# Altium PCB PCBVer2.PcbDoc
Units mm, origin at the board's own origin, x right, y up, seen from the top; angles counter-clockwise.
Board outline 39.9 x 13 mm, 6 copper layers (Top Layer, Layer 1, Sub Top Layer, Sub Bottom Layer, Layer 2, Bottom Layer), stack 1.244 mm thick; 66 components, 58 nets, 317 pads, 61 vias.
Unrouted connection lines stored in the file: 77.
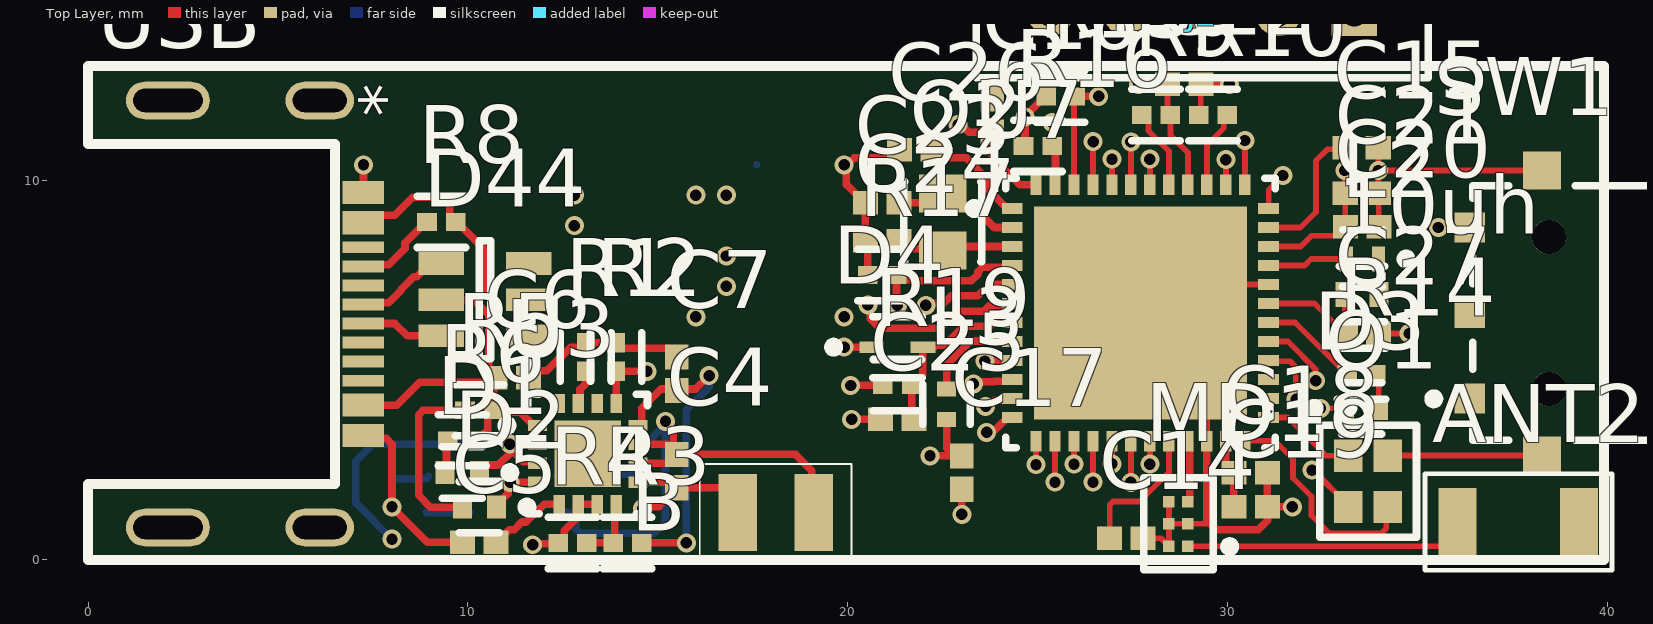
[diagram p0: Top Layer view]
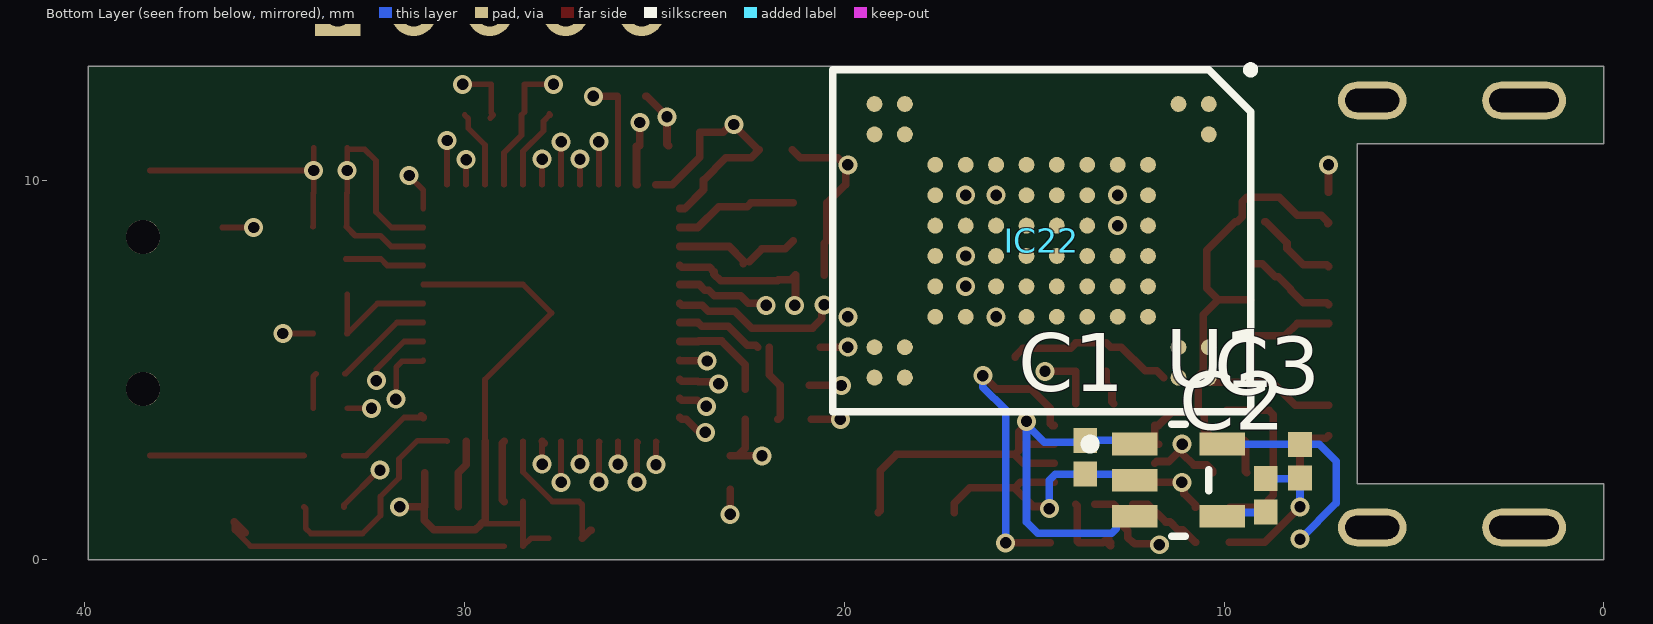
[diagram p1: Bottom Layer view, seen from below]
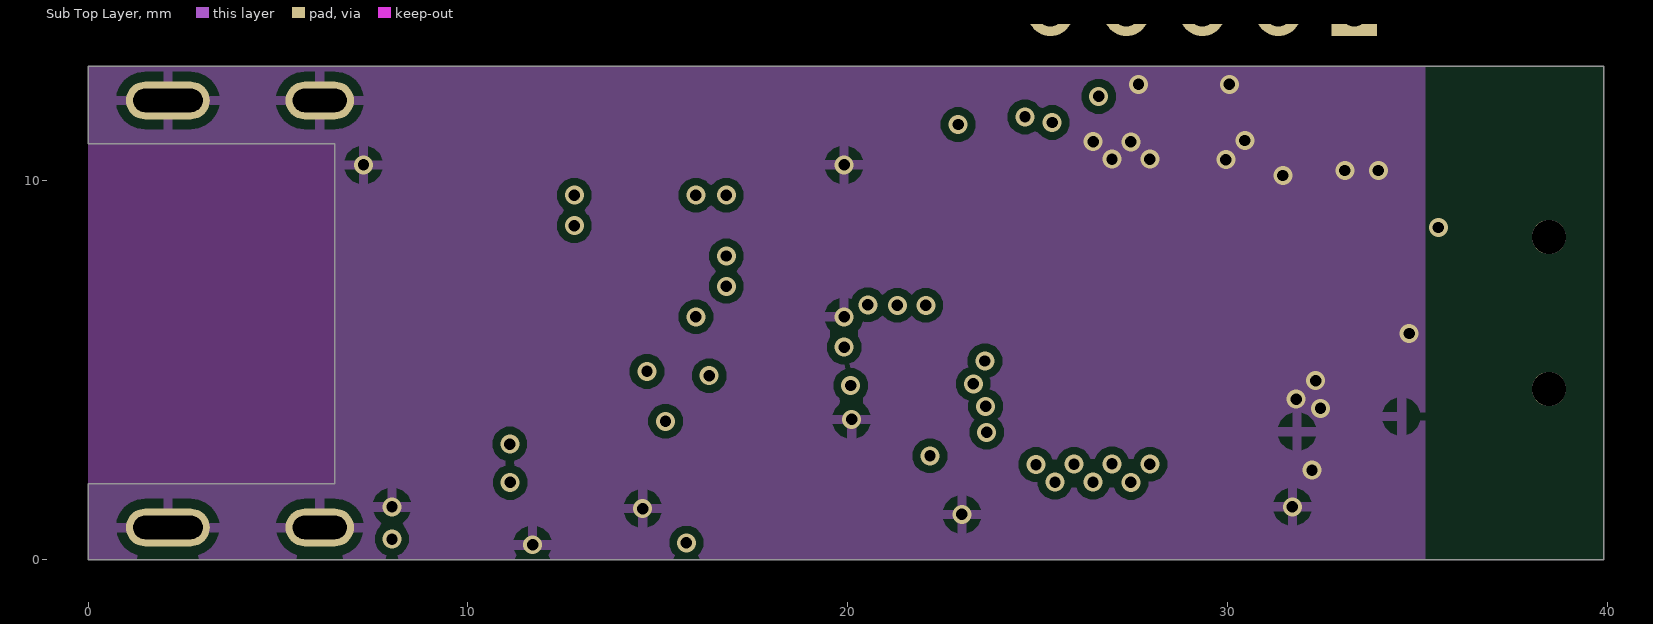
[diagram p2: Sub Top Layer]
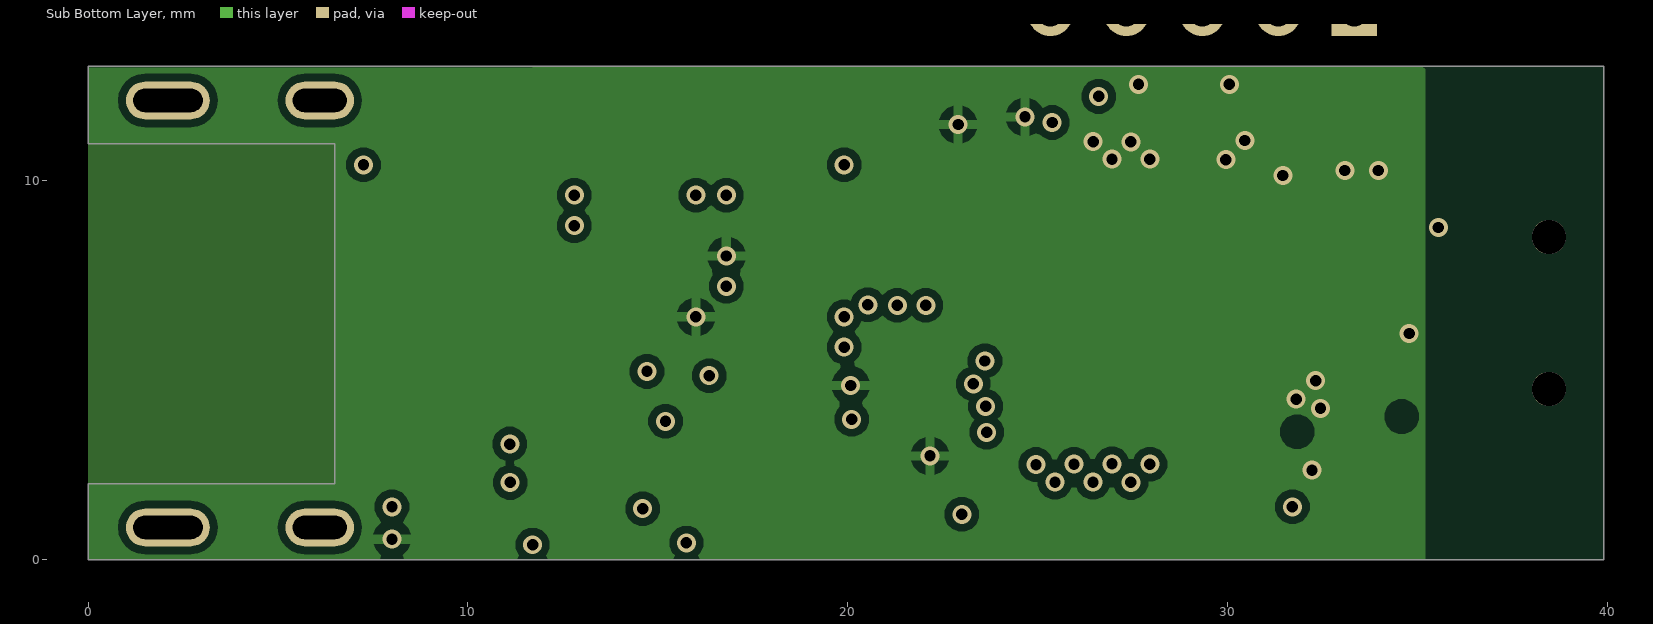
[diagram p3: Sub Bottom Layer]

## Layer stack, top to bottom
Top Solder: solder mask 0.0102, Solder Resist, Dk 3.5
Top Layer: signal copper 0.018
Dielectric 2: prepreg 0.125, PP-006, Dk 4.1
Layer 1: signal copper 0.035
Dielectric 4: prepreg 0.0711, PP-006, Dk 4.1
Sub Top Layer: signal copper 0.018
Dielectric 1: dielectric 0.71, FR-4, Dk 4.8
Sub Bottom Layer: signal copper 0.018
Dielectric 5: prepreg 0.0711, PP-006, Dk 4.1
Layer 2: signal copper 0.035
Dielectric 3: prepreg 0.125, PP-006, Dk 4.1
Bottom Layer: signal copper 0.018
Bottom Solder: solder mask 0.0102, Solder Resist, Dk 3.5

## Board outline
0,10.95 0,13 39.9,13 39.9,0 0,0 0,2 6.5,2 6.5,10.95

## Design rules (kind name [scope] priority, off if disabled: settings)
Clearance [All] p1: gap=0.2 ignorepadtopadclearanceinfootprint=FALSE except(0.175: Arc-Arc Arc-Track Arc-Via Arc-Hole Track-Track Track-Via Track-Hole Via-Via Via-Hole)
PolygonConnect [All] p1: connectstyle=Relief reliefconductorwidth=0.254 reliefentries=4 polygonreliefangle="90 Angle" airgapwidth=0.254
RoomDefinition U_LD3985M33R [InComponentClass('U_LD3985M33R')] p1: confinementstyle=ConfineIn formatcopy=TRUE lockcomponents=FALSE outline 15.1,-0.35 15.1,4.7 7.3,4.7 7.3,-0.35
RoomDefinition U_L6924D013TR [InComponentClass('U_L6924D013TR')] p2: confinementstyle=ConfineIn formatcopy=TRUE lockcomponents=FALSE outline 8.5,-0.35 20.45,-0.35 20.45,6.35 8.5,6.35
RoomDefinition U_USB [InComponentClass('U_USB')] p3: confinementstyle=ConfineIn formatcopy=TRUE lockcomponents=FALSE outline -0.35,-0.35 13.15,-0.35 13.15,13.35 -0.35,13.35
RoomDefinition U_VIBRO [InComponentClass('U_VIBRO')] p4: confinementstyle=ConfineIn formatcopy=TRUE lockcomponents=FALSE outline 6.85,46.829 31.85,46.829 31.85,59.829 6.85,59.829
RoomDefinition U_SWD [InComponentClass('U_SWD')] p5: confinementstyle=ConfineIn formatcopy=TRUE lockcomponents=FALSE outline 34.87,9.29 34.87,15.64 24.21,15.64 24.21,9.29
RoomDefinition U_STM32WB55CGU6 [InComponentClass('U_STM32WB55CGU6')] p6: confinementstyle=ConfineIn formatcopy=TRUE lockcomponents=FALSE outline 13.2,-0.36 40.32,-0.36 40.32,13.44 13.2,13.44
RoomDefinition U_M24512-DFMC6TG [InComponentClass('U_M24512-DFMC6TG')] p7: confinementstyle=ConfineIn formatcopy=TRUE lockcomponents=FALSE outline 11.825,37.148 17.825,37.148 17.825,44.148 11.825,44.148
RoomDefinition U_LSM6DSRXTR [InComponentClass('U_LSM6DSRXTR')] p8: confinementstyle=ConfineIn formatcopy=TRUE lockcomponents=FALSE outline 12.81,27.55 28.81,27.55 28.81,36.55 12.81,36.55
RoomDefinition U_LPS22HBTR [InComponentClass('U_LPS22HBTR')] p9: confinementstyle=ConfineIn formatcopy=TRUE lockcomponents=FALSE outline 13.21,19.2 23.21,19.2 23.21,26.2 13.21,26.2
RoutingVias [All] p1: holewidth=0.3 width=0.5 viastyle="Through Hole" minholewidth=0.3 minwidth=0.5 maxholewidth=0.3 maxwidth=0.5
SolderMaskExpansion [All] p1: expansion=0.102 istentingtop=FALSE
Width [All] p1: maxlimit=0.4 minlimit=0.15 preferedwidth=0.15 midlayer3_minwidth=0.254 midlayer3_maxwidth=0.254 midlayer3_prefwidth=0.254 midlayer4_minwidth=0.254 midlayer4_maxwidth=0.254 midlayer4_prefwidth=0.254 minimp=50.000000 maximp=50.000000 favimp=50.000000
30 further rules are at their usual default settings.

## Classes and differential pairs
component class U_VIBRO: D5 Q1 R11 R12 V
component class U_USB: D44 R8 USB
component class U_TC58BVG1S3HBAI4: IC22
component class U_SWD: J2 R9 R10
component class U_STM32WB55CGU6: 10uh ANT2 C14 C15 C16 C17 C18 C19 C20 C21 C22 C23 C24 C25 C26 C27 D3 D4 L2 L3 MD1 O1 O2 R14 R15 R16 R17 R19 SW1 U7
component class U_M24512-DFMC6TG: U2
component class U_LSM6DSRXTR: C9 C10 U5
component class U_LPS22HBTR: C8 U4
component class U_LD3985M33R: C1 C2 C3 U1
component class U_L6924D013TR: B C4 C5 C6 C7 D1 D2 R1 R2 R3 R4 R5 R6 U3

## Components (designator, comment, footprint, x,y, rotation, side; value= is the part's Value field where it differs from the comment)
10uh "L1" FP-LQW15DN_00-MFG 33.53,6.99 r180 top
ANT2 "KH3216-A55" KH3216-A55 37.7,1 r270 top
B "BAT-CON" BAT-CON 18.1,1.25 r180 top
C1 "10 uF" CAPC1005X55X25NL05T10 13.65,2.7 r90 bottom
C2 "10 nF" CAPC1005X55X25NL05T10 8.9,1.7 r270 bottom
C3 "1 uF" CAPC1005X55X25NL05T10 8,2.6 r90 bottom
C4 "1 uF" CAPC1005X55X25NL05T10 15.5,2.34 r90 top
C5 "330 pF" CAPC1005X55X25NL05T10 10.3,0.469 r180 top
C6 "1 uF" CAPC1005X55X25NL05T10 11.15,4.8 r0 top
C7 "1 uF" CAPC1005X55X25NL05T10 15.5,4.9 r270 top
C8 "4.7 uF" CAPC1005X55X25NL05T10 20.21,22.2 r0 top
C9 "100 nF" CAPC1005X55X25NL05T10 20.81,32.55 r0 top
C10 "100 nF" CAPC1005X55X25NL05T10 24.81,31.55 r90 top
C14 "100 nF" CAPC1005X55X25NL05T10 27.33,0.57 r0 top
C15 "100 nF" CAPC1005X55X25NL05T10 33.52,10.85 r180 top
C16 "100 nF" CAPC1005X55X25NL05T10 23.8,11.7 r90 top
C17 "100 nF" CAPC1005X55X25NL05T10 23,2.3 r90 top
C18 "100 nF" CAPC1005X55X25NL05T10 30.6,2.3 r0 top
C19 "100 pF" CAPC1005X55X25NL05T10 30.6,1.4 r180 top
C20 "4.7 uF" CAPC1005X55X25NL05T10 33.54,8.77 r180 top
C21 "100 nF" CAPC1005X55X25NL05T10 33.53,9.65 r0 top
C22 "100 nF" CAPC1005X55X25NL05T10 28.85,12.52 r180 top
C23 "4.3 pF" CAPC1005X55X25NL05T10 20.9,9.4 r180 top
C24 "4.3 pF" CAPC1005X55X25NL05T10 20.9,8.4 r0 top
C25 "100 nF" CAPC1005X55X25NL05T10 21.3,3.7 r0 top
C26 "100 nF" CAPC1005X55X25NL05T10 21.8,10.8 r0 top
C27 "4.7 uF" CAPC1005X55X25NL05T10 33.53,5.96 r0 top
D1 "LED" FP-SML-P11MTT86-MFG 9.85,2.3 r180 top
D2 "LED" FP-SML-P11MTT86-MFG 10.3,1.39 r180 top
D3 "LED" FP-SML-P11MTT86-MFG 33.52,3.99 r0 top
D4 "BAT54KFILM" FP-SOD-523-MFG 21.3,5.6 r0 top value=7pF
D5 "BAT43W-7-F" BAT43W-7-F 12.85,53.829 r90 top
D44 "USBLC6-2SC6" STM-SOT23-6L_V 10.45,6.85 r180 top
IC22 "TC58BVG1S3HBAI4" BGA63C80P10X12_900X1100X100 14.8,8.4 r270 bottom
J2 "B5B-PH-K-S(LF)(SN)" FP-B5B-PH-K-S_LF_SN-MFG 29.33,14.94 r180 top
L2 "10nh" FP-LQG15WH_02-MFG 33.54,7.92 r180 top
L3 "FBH1005-601Y" FP-BLM15-0_05-MFG 22.6,4.1 r90 top
MD1 "MLPF-WB55-01E3" FP-MLPF-WB55-01E3-MFG 28.7,0.95 r180 top
O1 "NX2016SA-32MHZ" FP-NX2016SA-MFG 33.69,2.07 r270 top
O2 "NX2012SA-32.768K" FP-NX2012SA-MFG 22.5,8.9 r270 top
Q1 "DMG3420U-7" DIOD-SOT23-3_B_V 29.85,54.829 r0 top
R1 "130 Kohm" FP-RC1005-IPC_C 13.1,5.34 r90 top
R2 "3.3 Kohm" FP-RC1005-IPC_C 13.9,5.34 r90 top
R3 "1 Kohm" FP-RC1005-IPC_C 14.2,0.45 r180 top
R4 "470 ohm" FP-RC1005-IPC_C 12.75,0.45 r180 top
R5 "680 Om" FP-RC1005-IPC_C 10.3,3.94 r180 top
R6 "680 Om" FP-RC1005-IPC_C 9.85,3.15 r180 top
R8 "5.3 Kohm" FP-RC1005-IPC_C 9.3,8.9 r0 top
R9 "10 Kohm" FP-RC1005-IPC_C 28.11,11.71 r180 top
R10 "10 Kohm" FP-RC1005-IPC_C 29.61,11.71 r0 top
R11 "100 Kohm" FP-RC1005-IPC_C 7.85,55.829 r0 top
R12 "100 ohm" FP-RC1005-IPC_C 16.85,55.829 r90 top
R14 "0 ohm" FP-RC1005-IPC_C 33.52,4.9 r0 top
R15 "1.8 Kohm" FP-RC1005-IPC_C 25.6,12.2 r180 top
R16 "1.8 Kohm" FP-RC1005-IPC_C 25,10.9 r180 top
R17 "10Kohm" FP-RC1005-IPC_C 20.9,7.5 r180 top
R19 "100 Kohm" FP-RC1005-IPC_C 21.3,4.6 r180 top
SW1 "JS102000SAQN" FP-JS102000SAQN-MFG 38.8,6.5 r90 top
U1 "LD3985M33R" FP-SOT23-5L-7049676-MFG 11.2,2.1 r180 bottom
U2 "M24512-DFMC6TG" M24512-DFMC6TG 14.925,38.898 r0 top
U3 "L6924D013TR" FP-VFQFPN16-7185330-MFG 13.15,2.79 r0 top
U4 "LPS22HBTR" FP-HLGA-10L-8479831-0 16.21,21.2 r0 top
U5 "LSM6DSRXTR" FP-LGA-14L-DM00249496-MFG 15.81,30.55 r0 top
U7 "STM32WB55CGU6" FP-STM32WB55CGU6-MFG 27.7,6.5 r0 top
USB "USB4510-03-1-A" USB4510-03-1-A 3.3,6.5 r270 top
V "VIBRO" VIBRO 24.85,58.829 r0 top

## Footprints (in the part's own frame and the unit in brackets; to place one, negate y for a bottom-side part, rotate by r counter-clockwise, add the part's x,y. Pads: shape width x height; smd on the part's side, far side on the other; paste and mask are expansions set on the pad)
BAT43W-7-F [mil]
  rect 43.75x23.65 smd paste+0 mask+0: 1(-65.91,1) 2(69.91,1)
  silkscreen extent -59,-31 63,33
BAT-CON [mil]
  rect 40x80 smd: 1(-39.37,0) 2(39.37,0)
  silkscreen extent -79,-50 79,50
BGA63C80P10X12_900X1100X100 [mm]
  round 0.418 smd: A1(-3.6,4.4) A2(-2.8,4.4) A9(2.8,4.4) A10(3.6,4.4) B1(-3.6,3.6) B9(2.8,3.6) B10(3.6,3.6) C3(-2,2.8) C4(-1.2,2.8) C5(-0.4,2.8) C6(0.4,2.8) C7(1.2,2.8) C8(2,2.8) D3(-2,2) D4(-1.2,2) D5(-0.4,2) D6(0.4,2) D7(1.2,2) D8(2,2) E3(-2,1.2) E4(-1.2,1.2) E5(-0.4,1.2) E6(0.4,1.2) E7(1.2,1.2) E8(2,1.2) F3(-2,0.4) F4(-1.2,0.4) F5(-0.4,0.4) F6(0.4,0.4) F7(1.2,0.4) F8(2,0.4) G3(-2,-0.4) G4(-1.2,-0.4) G5(-0.4,-0.4) G6(0.4,-0.4) G7(1.2,-0.4) G8(2,-0.4) H3(-2,-1.2) H4(-1.2,-1.2) H5(-0.4,-1.2) H6(0.4,-1.2) H7(1.2,-1.2) H8(2,-1.2) J3(-2,-2) J4(-1.2,-2) J5(-0.4,-2) J6(0.4,-2) J7(1.2,-2) J8(2,-2) K3(-2,-2.8) K4(-1.2,-2.8) K5(-0.4,-2.8) K6(0.4,-2.8) K7(1.2,-2.8) K8(2,-2.8) L1(-3.6,-3.6) L2(-2.8,-3.6) L9(2.8,-3.6) L10(3.6,-3.6) M1(-3.6,-4.4) M2(-2.8,-4.4) M9(2.8,-4.4) M10(3.6,-4.4)
  silkscreen extent -4.6,-5.5 4.5,5.6, body extent -4.5,-5.5 4.5,5.5, height 1
CAPC1005X55X25NL05T10 [mm] "Chip Capacitor, 2-Leads, Body 1.00x0.50mm, IPC Medium Density"
  rect 0.66x0.62 smd: 1(-0.44,0) 2(0.44,0)
  body extent -0.53,-0.28 0.53,0.27, height 0.55
DIOD-SOT23-3_B_V [mm] "SOT23, 3-Leads, Body 2.9x1.3mm, Pitch 0.95mm"
  rect 0.9x0.8 smd: 1(-1,0.95) 2(-1,-0.95) 3(1,0)
  silkscreen extent -1.12,-1.45 0.65,2.02, body extent -0.65,-1.45 0.65,1.45, height 1.17
FP-B5B-PH-K-S_LF_SN-MFG [mm]
  rect 1.2x1.2 hole 0.7 paste-2539.97 mask+0: 1(-4,0.55)
  round 1.2 hole 0.7 paste-2539.97 mask+0: 2(-2,0.55) 3(0,0.55) 4(2,0.55) 5(4,0.55)
  silkscreen extent -6.68,-2.25 5.95,2.25, body extent -6.05,-2.35 6.05,2.35, height 0.25
FP-BLM15-0_05-MFG [mm]
  rect 0.4x0.5 smd paste+0 mask+0: 1(-0.4,0) 2(0.4,0)
  silkscreen extent -0.53,-0.63 0.52,0.63, body extent -0.7,-0.38 0.7,0.38, height 0.25
FP-HLGA-10L-8479831-0 [mm]
  rect 0.375x0.35 smd paste+0 mask+0: 1(-0.763,0.25) 2(-0.763,-0.25) 6(0.763,-0.25) 7(0.763,0.25)
  rect 0.35x0.375 smd paste+0 mask+0: 3(-0.5,-0.763) 4(0,-0.763) 5(0.5,-0.763) 8(0.5,0.763) 9(0,0.763) 10(-0.5,0.763)
  silkscreen extent -2,-1.3 1.3,1.3, body extent -1.55,-1.55 1.55,1.55, height 0.25
FP-JS102000SAQN-MFG [mm]
  rect 0.8x0.8 smd paste+0 mask+0: 1(-2.25,2.43) 2(0,2.43) 3(2.25,2.43)
  rect 1x1 smd paste+0 mask+0: 4(-3.75,0.53) 5(3.75,0.53)
  round 0.9 hole 0.9 unplated paste-2539.97 mask+0: ""(-2,0.35) ""(2,0.35)
  silkscreen extent -3.35,-2.35 3.35,3.5, body extent -4.35,-2.45 4.35,2.93, height 0.25
FP-LGA-14L-DM00249496-MFG [mm]
  rect 0.575x0.35 smd paste-1000 mask+0: 1(-1.162,0.75) 2(-1.162,0.25) 3(-1.162,-0.25) 4(-1.162,-0.75) 8(1.162,-0.75) 9(1.162,-0.25) 10(1.162,0.25) 11(1.162,0.75)
  rect 0.35x0.575 smd paste-1000 mask+0: 5(-0.5,-0.913) 6(0,-0.913) 7(0.5,-0.913) 12(0.5,0.913) 13(0,0.913) 14(-0.5,0.913)
  silkscreen extent -2.57,-1.6 1.85,1.6, body extent -2.05,-1.8 2.05,1.8, height 0.25
FP-LQG15WH_02-MFG [mm]
  rect 0.35x0.65 smd paste+0 mask+0: 1(-0.425,0) 2(0.425,0)
  silkscreen extent -1.28,-0.78 0.53,0.72, body extent -0.7,-0.43 0.7,0.43, height 0.25
FP-LQW15DN_00-MFG [mm]
  rect 0.5x0.66 smd paste+0 mask+0: 1(-0.45,0) 2(0.45,0)
  silkscreen extent -0.6,-0.74 0.6,0.72, body extent -0.8,-0.48 0.8,0.48, height 0.25
FP-MLPF-WB55-01E3-MFG [mm]
  rect 0.3x0.3 smd paste-1000 mask-1000: A1(-0.25,0.587) A2(-0.25,0) A3(-0.25,-0.587) B1(0.25,0.587) B2(0.25,0) B3(0.25,-0.587)
  silkscreen extent -1.48,-1.21 0.91,1.21, body extent -1.01,-1.31 1.01,1.31, height 0.25
FP-NX2012SA-MFG [mm]
  rect 1x1.25 smd paste+0 mask+0: 1(-0.75,0) 2(0.75,0)
  silkscreen extent -1.05,-1.02 1.05,1.02, body extent -1.35,-0.72 1.35,0.72, height 0.25
FP-NX2016SA-MFG [mm]
  rect 0.85x0.75 smd paste+0 mask+0: 1(-0.675,-0.525) 2(0.675,-0.525) 3(0.675,0.525) 4(-0.675,0.525)
  silkscreen extent -2.07,-1.28 1.48,1.28, body extent -1.2,-1 1.2,1, height 0.25
FP-RC1005-IPC_C [mm]
  rect 0.515x0.472 smd paste+0 mask+0: 1(-0.379,0) 2(0.379,0)
  silkscreen extent -0.64,-0.67 0.64,0.67, body extent -0.74,-0.38 0.74,0.38, height 0.25
FP-SML-P11MTT86-MFG [mm]
  rect 0.5x0.6 smd paste+0 mask+0: 1(-0.45,0) 2(0.45,0)
  silkscreen extent -1.38,-0.67 0.53,0.67, body extent -0.8,-0.43 0.8,0.43, height 0.25
FP-SOD-523-MFG [mm]
  rect 0.65x0.3 smd paste+0 mask+0: 1(-0.675,0) 2(0.675,0)
  silkscreen extent -1.8,-0.8 0.65,0.8, body extent -1.1,-0.55 1.1,0.55, height 0.25
FP-SOT23-5L-7049676-MFG [mm]
  rect 1.2x0.6 smd paste+0 mask+0: 1(-1.15,0.95) 2(-1.15,0) 3(-1.15,-0.95) 4(1.15,-0.95) 5(1.15,0.95)
  silkscreen extent -2.45,-1.48 0.8,1.47, body extent -0.87,-1.5 0.87,1.5, height 1.45
FP-STM32WB55CGU6-MFG [mm]
  rect 0.55x0.3 smd paste+0 mask+0: 1(-3.375,2.75) 2(-3.375,2.25) 3(-3.375,1.75) 4(-3.375,1.25) 5(-3.375,0.75) 6(-3.375,0.25) 7(-3.375,-0.25) 8(-3.375,-0.75) 9(-3.375,-1.25) 10(-3.375,-1.75) 11(-3.375,-2.25) 12(-3.375,-2.75) 25(3.375,-2.75) 26(3.375,-2.25) 27(3.375,-1.75) 28(3.375,-1.25) 29(3.375,-0.75) 30(3.375,-0.25) 31(3.375,0.25) 32(3.375,0.75) 33(3.375,1.25) 34(3.375,1.75) 35(3.375,2.25) 36(3.375,2.75)
  rect 0.3x0.55 smd paste+0 mask+0: 13(-2.75,-3.375) 14(-2.25,-3.375) 15(-1.75,-3.375) 16(-1.25,-3.375) 17(-0.75,-3.375) 18(-0.25,-3.375) 19(0.25,-3.375) 20(0.75,-3.375) 21(1.25,-3.375) 22(1.75,-3.375) 23(2.25,-3.375) 24(2.75,-3.375) 37(2.75,3.375) 38(2.25,3.375) 39(1.75,3.375) 40(1.25,3.375) 41(0.75,3.375) 42(0.25,3.375) 43(-0.25,3.375) 44(-0.75,3.375) 45(-1.25,3.375) 46(-1.75,3.375) 47(-2.25,3.375) 48(-2.75,3.375)
  rect 5.6x5.6 smd paste+0 mask+0: 49(0,0)
  silkscreen extent -4.5,-3.55 3.55,3.55, body extent -3.75,-3.75 3.75,3.75, height 0.25
FP-VFQFPN16-7185330-MFG [mm]
  rect 0.5x0.3 smd paste+0 mask+0: 1(-1.325,0.75) 2(-1.325,0.25) 3(-1.325,-0.25) 4(-1.325,-0.75) 9(1.325,-0.75) 10(1.325,-0.25) 11(1.325,0.25) 12(1.325,0.75)
  rect 0.3x0.5 smd paste+0 mask+0: 5(-0.75,-1.325) 6(-0.25,-1.325) 7(0.25,-1.325) 8(0.75,-1.325) 13(0.75,1.325) 14(0.25,1.325) 15(-0.25,1.325) 16(-0.75,1.325)
  rect 1.75x1.75 smd paste+0 mask+0: 17(0,0)
  silkscreen extent -2.25,-1.58 1.58,1.58, body extent -1.68,-1.68 1.68,1.68, height 0.25
KH3216-A55 [mm]
  rect 1.8x1 smd: 1(0,-1.651) 2(0,1.549)
  silkscreen extent -1.27,-2.51 1.27,2.41
M24512-DFMC6TG [mm]
  rect 0.8x0.25 smd paste+0 mask+0: 1(-1.475,0.852) 2(-1.475,0.352) 3(-1.475,-0.149) 4(-1.475,-0.649) 5(1.424,-0.649) 6(1.424,-0.149) 7(1.424,0.352) 8(1.424,0.852)
  silkscreen extent -2.53,-1.08 0.88,1.28
STM-SOT23-6L_V [mm] "SOT23, 6-Leads, Body 3.05x1.75mm, Pitch 0.95mm"
  rect 1.2x0.6 smd: 1(-1.15,0.95) 2(-1.15,0) 3(-1.15,-0.95) 4(1.15,-0.95) 5(1.15,0) 6(1.15,0.95)
  silkscreen extent -1.28,-1.55 0.15,1.92, body extent -1.6,-1.53 1.6,1.53, height 1.45
USB4510-03-1-A [mil]
  rect 24x43 smd paste+0 mask+0: A1-B12(-125,155.5) A4-B9(-93.5,155.5) B1-A12(127,155.5) B4-A9(95.5,155.5)
  rect 12x43 smd paste+0 mask+0: A5(-48.2,155.5) A6(-8.8,155.5) A7(10.9,155.5) A8(50.3,155.5) B5(70,155.5) B6(30.6,155.5) B7(-28.5,155.5) B8(-68,155.5)
  oval 39x71 hole 24 slot 56 at 90 deg: GND(-220.25,110.25) GND(222.25,110.25)
  oval 39x87 hole 24 slot 72 at 90 deg: GND(-220.25,-47.2) GND(222.25,-47.2)
VIBRO [mil]
  rect 40x40 smd mask+1: 1(40,0) 2(-40,0)
  silkscreen extent -65,-455 65,25

## Part data
10uh: library part CMP-06042-016523-1, "FIXED IND 10UH 120MA 5.405OHM", RoHS Compliant=Yes
C1 C2 C3 C4 C5 C6 C7 C8 C9 C10 C14 C15 C16 C17 C18 C19 C20 C21 C22 C23 C24 C25 C26 C27: library part CMP-2008-04515-1, Manufacturer=Murata, Part Number=GRM155F50J684ZE01D
D1 D2 D3: library part CMP-2000-07126-2, "LED YELLOW/GREEN CLEAR 1006 SMD", Case Code (Imperial)=0402, Case Code (Metric)=1005, Color=Green, Forward Current=20mA, Forward Voltage=1.9V, Lens Color=Colorless, Max Operating Temperature=85°C, Min Operating Temperature=-40°C, Package Quantity=1, Power Rating=54mW, Test Current=1mA, Case/Package=0402, Dominant Wavelength=569nm, Height=0.25mm, Illumination Color=Green, Lead Free="Lead Free", Length=1mm, Lens Style=Diffused, Lens Transparency=Clear, Luminous Intensity=2.1mcd, Mount="Surface Mount", Number of LEDs=1, Number of Pins=2, Packaging="Tape and Reel", Radiation Hardening=No, REACH SVHC="No SVHC", RoHS Compliant=Yes, Series=PicoLED™, Viewing Angle=150°, Wavelength=569nm, Width=0.6mm
D4: library part CMP-12187-000026-1, "DIODE SCHOTTKY 40V 300MA SOD523", Capacitance=7pF, Forward Current=300mA, Manufacturer=STMicroelectronics, Max Junction Temp=+150°C, Max Repetitive Reverse Voltage=40V, Max Surge Forward Current=1.25A, Package=SOD-523, Peak Reverse Current=1uA, Temperature="-40°C to +150°C", Temperature Range Low=-40°C, Automotive=No, Category=Diode, ComponentLink2Description=Datasheet, ComponentLink2URL=https://www.st.com/content/ccc/resource/technical/document/datasheet/07/50/54/f2/0d/ba/4a/79/CD00001322.pdf/files/CD00001322.pdf/jcr:content/translations/en.CD00001322.pdf, Device Class L1="Discrete Semiconductors", Device Class L2=Diodes, Device Class L3="Schottky Diodes", Digikey Description="DIODE SCHOTTKY 40V 300MA SOD523", Height=0.7mm, Lead Free=Yes, Manufacturer Part Number=BAT54KFILM, Mouser Description="Schottky Diodes & Rectifiers schottky diode", Octopart=https://octopart.com/bat54kfilm-stmicroelectronics-39618022, RoHS=TRUE, Temperature Range High=+150°C
D44: library part CMP-2000-05378-1, "Very low capacitance ESD protection, 3.5 pF, -40 to 125 degC, 6-Pin SOT23, RoHS, Tape and Reel", Capacitance Value=3.5pF, Clamping Voltage=17V, Leakage Current=0.15uA, Manufacturer=STMicroelectronics, Operating Temp Range=-40Cto125C, Operating Temperature Classification=Automotive, Operating Temperature Max Deg. C=125C, Operating Temperature Min Deg. C=-40C, Package / Case=SOT-23, Package Description="6-Pin Small Outline Transistor, Body 2.925 x 1.625 mm, Pitch 0.95 mm", Package Reference=SOT23-6L, Peak Pulse Current=5A, Reverse Breakdown Voltage=6V, Reverse Stand-off Voltage=5V, Test Current (It)=1mA, Clamping Voltage (Max)=17V, Configuration=Dual, Datasheet URL=http://www.st.com/st-web-ui/static/active/en/resource/technical/document/datasheet/CD00050750.pdf, Datasheet Version="Rev. 5, 10/2011", Direction Type=Uni-Directional, Leakage Current (Max)=0.15uA, Manufacturer URL=http://www.st.com/, Mounting=SurfaceMount, Mounting Style=SurfaceMount, Number of Elements=1, Packaging=TapeandReel, Pin Count=6, Polarity=Uni-Directional, Product Depth (mm)=1.75mm, Product Height (mm)=1.3mm, Product Length (mm)=3.05mm, Rad Hardened=No, Suppressor Type=DiodeArrays, Working Voltage=5V, Working Voltage (Max)=5V
IC22: "Integrated Circuit", Manufacturer_Name=Toshiba, Mouser Part Number=757-TC58BVG1S3HBAI4, Datasheet Link=https://media.digikey.com/pdf/Data%20Sheets/Toshiba%20PDFs/KIOXIA_TC58BVG1S3HBAI4_REV2.00_E20191001C.pdf, Height=1mm, Manufacturer_Part_Number=TC58BVG1S3HBAI4, Mouser Price/Stock=https://www.mouser.com/Search/Refine.aspx?Keyword=757-TC58BVG1S3HBAI4
J2: library part CMP-2000-05908-2, "CONN HEADER VERT 5POS 2MM", Color=Natural, Contact Resistance=20mR, Current Rating=2A, Flammability Rating="UL94 V-0", Housing Color=White, Insulation Resistance=1MR, Max Operating Temperature=85°C, Max Voltage Rating (AC)=100V, Min Operating Temperature=-25°C, Connector Type=Header, Contact Finish - Mating=TIN, Contact Material=Brass, Contact Mating Length=0.13inch, Contact Plating=Tin, Contact Shape=Square, Contact Type="Male Pin", Depth=4.5mm, Fastening Type=Detent, Gender=Male, Height=9.4mm, Housing Material=Polyamide, Insulation Color=Natural, Insulation Material=Nylon, Lead Free="Lead Free", Lead Pitch=2mm, Length=11.9mm, Mated Stacking Heights=8mm, Material=Polyamide, Max Current Rating=2A, Mount="Through Hole", Number of Contacts=5, Number of Pins=5, Number of Poles=5, Number of Positions=5, Number of Rows=1, Orientation=Straight, Packaging=Bulk, Pitch=2mm, REACH SVHC="No SVHC", Series=PH, Termination=Solder, Voltage Rating=100V, Voltage Rating (AC)=100V, Width=4.5mm, Working Voltage=100V
L2: library part CMP-06042-005237-1, "Multilayer type Inductor for Automotive 10nH ±5% 0.19Ω 500mA 0402", Case Code (Imperial)=0402, Case Code (Metric)=1005, Current Rating=500mA, DC Resistance (DCR)=190mR, Inductance=10nH, Max Operating Temperature=125°C, Min Operating Temperature=-55°C, Ratings=AEC-Q200, Self Resonant Frequency=3.3GHz, Test Frequency=100MHz, Tolerance=5%, Case/Package=0402, Core Material=Air, Mount="Surface Mount", Packaging="Cut Tape", Shielding=Unshielded
L3: library part CMP-0686-00187-4, "Chip Ferrite Bead, 0402, 600Ω @ 100MHz, 0.52Ω, 25%, 300mA", Case Code (Imperial)=0402, Case Code (Metric)=1005, Current Rating=300mA, DC Resistance (DCR)=520mR, DC Resistance-Max=600mR, Frequency=100MHz, Max Operating Temperature=125°C, Min Operating Temperature=-55°C, Package Quantity=10000, Tolerance=25%, Case/Package=0402, Core Material=Ferrite, DC Current=300mA, Depth=0.55mm, Height=0.5mm, Impedance=600R, Lead Free="Lead Free", Length=1mm, Material=Steel, Max Current Rating=300mA, Max DC Current=300mA, Military Standard=Not, Number of Circuits=1, Number of Lines=1, Number of Pins=2, Packaging="Tape and Reel", Radiation Hardening=No, REACH SVHC="No SVHC", RoHS Compliant=Yes, Series=BLM15AG_SN, Shielding=Unshielded, Termination=SMD/SMT, Test Frequency=100MHz, Width=0.5mm
MD1: library part CMP-12074-000002-1, "RF FILTER LOW PASS 2.45GHZ 6SMD"
O1: library part CMP-200220-000017-1, "CRYSTAL 32.0000MHZ 8PF SMD", Case/Package=SMD/SMT, ESR (Equivalent Series Resistance)=60R, Frequency=32MHz, Load Capacitance=8pF, Max Operating Temperature=125°C, Min Operating Temperature=-40°C, Ratings=AEC-Q200, Mount="Surface Mount", Packaging="Tape and Reel"
O2: library part CMP-200220-000019-1, "CRYSTAL 32.7680KHZ 12.5PF SMD", Case/Package=SMD/SMT, ESR (Equivalent Series Resistance)=80kR, Frequency=32.768kHz, Frequency Tolerance=20ppm, Load Capacitance=12.5pF, Max Operating Temperature=85°C, Min Operating Temperature=-40°C, Height=0.024inch, Length=0.081inch, Mount="Surface Mount", Packaging="Cut Tape", RoHS Compliant=Yes, Series=NX2012SA, Width=0.047inch
Q1: library part CMP-2000-06172-1, "N-Channel Enhancement Mode MOSFET, 20 V, -55 to 150 degC, 3-Pin SOT23, RoHS, Tape and Reel", Drain-Source On Resistance-Max=29mO, Drain-to-Source Voltage [Vdss]=20V, Manufacturer="Diodes Inc", Package Description="3-Pin Small Outline Transistor, Body 2.9 x 1.3 mm, Pitch 0.96 mm", Package Reference=SOT23-3, Rated Power Dissipation=740mW, Channel Type=N-Channel, Datasheet URL=http://www.diodes.com/_files/datasheets/ds31867.pdf, Datasheet Version="Rev. 5-2, 09/2013", Manufacturer URL=http://www.diodes.com/, Mounting Technology=SurfaceMount, Qg Gate Charge=5.4nC
R1 R2 R3 R4 R5 R6 R8 R9 R10 R11 R12 R14 R15 R16 R17 R19: library part CMP-13261-000953-1, "Res Thick Film 0402 1.87kΩ 1% 0.063W ±100ppm/°C Molded SMD T/R", Case Code (Imperial)=0402, Case Code (Metric)=1005, Max Operating Temperature=155°C, Max Power Dissipation=63mW, Min Operating Temperature=-55°C, Package Quantity=1, Resistance=1.87kR, Temperature Coefficient=100ppm/°C, Tolerance=1%, Voltage Rating (DC)=50V, Case/Package=0402, Composition="Thick Film", Contact Plating=Tin, Depth=0.5mm, Features="Moisture Resistant", Height=0.016inch, Lead Free="Lead Free", Length=1mm, Military Standard=Not, Number of Terminations=2, Packaging="Tape and Reel", Power Rating=63mW, Radiation Hardening=No, Width=0.02inch
SW1: library part CMP-10038-000025-1, "SWITCH SLIDE SPDT 1MA 5V", Actuator Color=Black, Case/Package=SMD/SMT, Contact Current Rating=1mA, Contact Resistance=70mR, Flammability Rating="UL94 V-2", Max Operating Temperature=85°C, Max Voltage Rating (DC)=5V, Min Operating Temperature=-20°C, Package Quantity=1, Actuator Length=1.5mm, Actuator Material=Nylon, Actuator Type=Standard, Contact Material="Copper Alloy", Contact Plating=Silver, Current Rating=1mA, Depth=4.82mm, Electrical Life=15000Cycles, Housing Material=Nylon, Length=7.8mm, Max Current Rating=1mA, Mount="Surface Mount", Orientation="Right Angle", Packaging="Tape and Reel", Radiation Hardening=No, REACH SVHC="No SVHC", RoHS Compliant=Yes, Series=JS, Switch Function=On-On, Switch Travel=1.5mm, Termination="Gull Wing", Throw Configuration=SPDT, Voltage Rating (DC)=5V
U1: library part CMP-0244-00328-2, "IC REG LINEAR 3.3V 150MA SOT23-5", Case/Package=SOT-23, Dropout Voltage=60mV, Input Bias Current=85uA, Max Input Voltage=6V, Max Operating Temperature=125°C, Max Output Current=150mA, Min Current Limit=300mA, Min Input Voltage=2.5V, Min Operating Temperature=-40°C, Min Output Voltage=3.3V, Output Voltage Accuracy=2%, Package Quantity=1, Quiescent Current=150uA, Accuracy=2%, Height=1.3mm, Lead Free="Lead Free", Length=3mm, Mount="Surface Mount", Number of Outputs=1, Number of Pins=5, Number of Regulators=1, Output Current=150mA, Output Type=Fixed, Output Voltage=3.3V, Packaging="Tape and Reel", Polarity=Positive, Radiation Hardening=No, Width=1.75mm
U3: library part CMP-12147-000005-1, "IC BATT CHRGR ION/POLY 16-VFQFPN", Manufacturer=STMicroelectronics, Max Junction Temp=+125°C, Max Power Dissipation=0.67W, Max Supply Voltage=12V, Min Supply Voltage=2.5V, Nominal Supply Current=1.8mA, Output Current=975mA, Output Voltage=4.2V, Package=VFQFPN16-7185330, Temperature="-40°C to +125°C", Temperature Range Low=-40°C, Automotive=No, Category=IC, ComponentLink2Description=Datasheet, ComponentLink2URL=https://www.st.com/resource/en/datasheet/l6924d.pdf, Device Class L1="Integrated Circuits (ICs)", Device Class L2="Power Management ICs", Device Class L3="Battery Management", Digikey Description="IC BATT CHRGR ION/POLY 16-VFQFPN", Footprint Url=https://www.st.com/resource/en/datasheet/l6738.pdf, Height=1mm, Ipc Land Pattern Name=QFN50P300X300X90-16, Lead Free=Yes, Manufacturer Part Number=L6924D013TR, Mouser Description="Battery Management Battery Charger Sys Li-Ion/Li-Poly", Number Of Cells=1, Number of Outputs=1, Octopart=https://octopart.com/l6924d013tr-stmicroelectronics-421996, RoHS=TRUE, Standoff Height=0.02mm, Temperature Range High=+125°C
U4: library part CMP-12182-000004-1, "MEMS NANO PRESSURE SENSOR: 260-1", Manufacturer=STMicroelectronics, Max Supply Voltage=3.6V, Min Supply Voltage=1.7V, Operating Supply Current=3-12uA, Package=HLGA-10L-8479831, Temperature="-40°C to +85°C", Temperature Range High=+85°C, Temperature Range Low=-40°C, Automotive=No, Category=IC, ComponentLink2Description=Datasheet, ComponentLink2URL=https://www.st.com/resource/en/datasheet/lps22hb.pdf, Device Class L1=Sensors, Device Class L2="Pressure Sensors", Device Class L3=unset, Digikey Description="MEMS NANO PRESSURE SENSOR: 260-1", Footprint Url=https://www.st.com/content/ccc/resource/technical/document/technical_note/73/17/9c/16/dd/96/4a/01/CD00134799.pdf/files/CD00134799.pdf/jcr:content/translations/en.CD00134799.pdf, Height=0.8mm, Lead Free=Yes, Manufacturer Part Number=LPS22HBTR, Octopart=https://octopart.com/lps22hbtr-stmicroelectronics-51851131, Port Style="No Port", RoHS=TRUE, Sensor Output=I2C,SPI
U5: library part CMP-12177-000016-1, "CONSUMER MEMS", RoHS Compliant=Yes
U7: library part CMP-12105-000013-1, "ULTRA-LOW-POWER DUAL CORE ARM CO", Ambient Temperature Range High=+85°C, Ambient Temperature Range Low=-40°C, Frequency=64MHz, Manufacturer=STMicroelectronics, Max Junction Temp=+105°C, Max Supply Voltage=3.6V, Min Supply Voltage=1.71V, Package=UFQFPN48, Temperature="-40°C to +105°C", Automotive=No, Category=IC, ComponentLink2Description=Datasheet, ComponentLink2URL=https://www.st.com/resource/en/datasheet/stm32wb55cg.pdf, Core Architecture="ARM Cortex-M4", Data Bus Width=32bits, Device Class L1="Integrated Circuits (ICs)", Device Class L2="Embedded Processors and Controllers", Device Class L3=Microcontrollers, Digikey Description="ULTRA-LOW-POWER DUAL CORE ARM CO", Height=0.65mm, Interface=I2C,SPI,UART,USART,2-Wire,USB,IrDA,Other, Lead Free=Yes, Manufacturer Part Number=STM32WB55CGU6, Memory Size=1MBytes, Memory Type=FLASH, Number Of A/D Converters=1, Number Of Adc Channels=13, Number Of Cores=1, Number Of I2C Channels=2, Number Of I/Os=30, Number Of Pwm Channels=14, Number Of Spi Channels=1, Number Of Timers/Counters=6, Number Of Uart Channels=2, Number Of Usb Channels=1, Octopart=https://octopart.com/stm32wb55cgu6-stmicroelectronics-98750847, Ram Size=256KBytes, RoHS=TRUE, Standoff Height=0mm, Temperature Range High=+105°C, Temperature Range Low=-40°C

## Via types
v1: diameter 0.5, hole 0.3, Top Layer to Bottom Layer, 61 vias

## Nets (pads, with @x,y where several pads share a name; then routed paths per layer and width w, separated by ;. In a path a pad name is that pad's centre, name@x,y a point inside that pad or via, vN(x,y) a via of type N, cw(c..) or ccw(c..) an arc to the next point about the centre after c; other vN are vias at no path point)
+3.3: C3.2 C8.2 C9.2 C10.2 C14.1 C15.2 C16.1 C17.2 C18.1 C19.2 C20.2 C21.1 C22.2 C26.2 D5.1 IC22.H8 IC22.J6 J2.4 L3.1 R9.1 R15.2 R16.2 R19.2 SW1.3 U1.5 U2.1 U2.2 U2.8 U4.1 U4.6 U4.10 U5.1 U5.5 U5.8 U5.12 U7.1 U7.20 U7.23 U7.34 U7.35 U7.40 U7.48 V.2 | length 35.1
  Top Layer w0.15: C14.1 26.89,1.452 26.978,1.54 27.677,1.54 28.45,2.313 U7.20 ; v1(27.65,12.52) C22.2 28.41,11.789 R9.1 28.489,11.178 28.95,10.717 U7.40 ; U7.34 31.917,8.25 32.203,8.535 32.865,8.535 C20.2 33.09,8.78 C21.1 33.08,9.66 v1(33.08,10.25) C15.2 33.04,10.81 32.62,10.81 32.32,10.51 32.32,9.16 31.91,8.75 U7.35 U7.35@31.08,8.755 ; v1(35.54,8.75) SW1.3
  Top Layer w0.2: v1(20.075,4.592) 20.079,4.596 20.917,4.596 R19.2 ; v1(22.16,2.74) C17.2@22.8,2.74 ; L3.1 22.6,2.94 C17.2@22.8,2.74 ; C17.2 C17.2@22.8,2.74 ; U7.1 24.2,9.25 23.7,9.75 23.7,10 23.109,10.59 22.45,10.59 C26.2 22.26,10.8 22.9,11.44 v1(22.9,11.46) 22.981,11.46 23.181,11.26 C16.1 23.8,10.6 24.525,9.875 U7.48 ; R16.2 24.661,10.939 v1(24.661,11.661) 25.2,12.2 R15.2 ; C14.1@26.659,0.78 26.68,0.78 C14.1 ; U7.23 29.95,2.51 C18.1 C19.2
  Bottom Layer w0.2: v1(8,0.55) 7.05,1.5 7.05,2.6 7.49,3.04 C3.2 9.94,3.04 U1.5@10.05,3.15
  other v1: 16,6.4 16.8,8
GND: B.2 C1.1 C2.1 C3.1 C4.1 C5.2 C6.2 C7.1 C8.1 C9.1 C10.1 C14.2 C15.1 C16.2 C17.1 C18.2 C19.1 C20.1 C21.2 C22.1 C23.2 C24.1 C25.1 C26.1 C27.2 D3.1 D44.2 IC22.C5 IC22.K3 IC22.K8 J2.1 MD1.A2 MD1.B1 MD1.B2 MD1.B3 O1.2 O1.4 Q1.2 R1.2 R2.2 R4.2 R10.1 R11.2 R17.2 SW1.4 SW1.5 U1.2 U2.3 U2.4 U3.6 U3.7 U3.9 U4.3 U4.5 U4.8 U4.9 U5.6 U5.7 U7.22 U7.32 U7.49 USB.A1-B12 USB.B1-A12 USB.GND | length 59.2
  Top Layer w0.15: C14.2 28.243,0.57 MD1.B1 MD1.B2 ; MD1.B3 MD1.B2 ; R10.1@29.31,11.631 R10.1 29.29,11.769 C22.1 v1(30.04,12.52) ; U7.22 29.45,4.75 U7.49 28.45,7.25 U7.32 ; 29.578,0.918 29.546,0.95 MD1.A2 MD1.B2 ; v1@32.161,2.31 v1(32.214,2.363) 32.247,2.363 33.165,1.445 O1.2 ; v1(32.44,3.99) D3.1 ; C15.1 v1(33.96,10.25) ; C27.2 v1(34.77,5.96) ; C20.1 33.97,8.78 C21.2 33.96,9.66 v1(33.96,10.25) ; O1.4 34.22,2.75 SW1.4 ; SW1.5 v1(33.96,10.25)
  Top Layer w0.2: USB.B1-A12 7.324,3.2 7.85,3.2 8,3.05 v1(8,1.4) 8.931,0.469 C5.2 ; USB.A1-B12 v1(7.25,10.4) ; C6.2 11.767,4.977 12.077,4.977 12.7,5.6 12.982,5.6 R1.2 R2.2 13.9,5.706 14.036,5.57 15.29,5.57 15.5,5.36 C7.1 ; v1(11.7,0.4) 11.725,0.425 12.346,0.425 R4.2 ; R4.2@12.393,0.45 12.529,0.586 12.529,0.77 12.85,1.091 12.85,1.415 U3.6 U3.7 ; U3.9 15.36,2.04 C4.1 ; v1(14.6,1.35) 14.657,1.407 15.027,1.407 15.5,1.88 C4.1 ; B.2 17.1,1.492 16.692,1.9 C4.1 ; v1(19.9,10.4) 19.957,10.343 19.957,9.883 20.44,9.4 C23.2 C24.1 20.521,8.339 R17.2 ; v1@19.981,10.4 20.171,10.59 21.15,10.59 C26.1 ; v1(20.1,3.7) C25.1 ; v1(23,1.2) C17.1 ; U7.22 29.45,1.046 29.546,0.95 ; 29.578,0.918 29.706,0.79 30.8,0.79 31.05,1.04 31.05,1.39 C19.1 ; C18.2 C19.1 ; v1(31.7,1.4) C19.1
  Bottom Layer w0.2: v1(8,1.4) C3.1@8,2.139 ; C3.1@8.001,2.14 C2.1 C2.1@8.96,2.2 ; U1.2@12.35,2.2 12.41,2.26 C1.1 14.44,2.26 14.6,2.1 v1(14.6,1.35)
  other v1: 19.9,6.4
Net10uh_1: 10uh.1 L2.1
Net10uh_2: 10uh.2 C27.1 U7.31 | length 3.4
  Top Layer w0.15: U7.31 32.28,6.75 C27.1@33.07,5.96 ; 10uh.2 33.08,5.97 C27.1
NetANT2_1: ANT2.1 MD1.A1 | length 7.9
  Top Layer w0.15: MD1.A1 35.624,0.363 36.049,0.788 ANT2.1
  Top Layer w0.2: ANT2.1@35.762,0.713 ANT2.1
NetC2_2: C2.2 U1.4 | length 1.2
  Bottom Layer w0.2: C2.2 8.91,1.25 U1.4@10.05,1.25
NetC5_1: C5.1 U3.5 | length 2.1
  Top Layer w0.2: C5.1 10.76,0.469 11.081,0.79 11.212,0.79 11.422,1 11.539,1 12.004,1.465 U3.5
NetC7_2: C7.2 R3.1 U3.12 | length 8.5
  Top Layer w0.2: U3.12 14.523,3.54 14.573,3.59 14.573,3.99 15.083,4.5 16,4.5 v1(16.35,4.85) ; R3.1 v1(15.75,0.45)
  Bottom Layer w0.2: v1(15.75,0.45) 15.75,3.95 16.35,4.55 v1(16.35,4.85)
NetC23_1: C23.1 O2.1 U7.2 | length 3.3
  Top Layer w0.2: C23.1 22.45,9.4 22.5,9.35 22.55,9.3 23.3,9.3 23.85,8.75 U7.2
NetC24_2: C24.2 O2.2 U7.3 | length 3.3
  Top Layer w0.2: C24.2 21.55,8.19 22.16,8.19 O2.2@22.5,7.85 ; O2.2@22.65,7.8 22.65,7.875 23.025,8.25 U7.3
NetC25_2: C25.2 D4.2 R19.1 U7.7 | length 4.4
  Top Layer w0.2: C25.2 21.679,3.761 R19.1 21.7,4.6 21.975,4.875 D4.2 ; D4.2@22.275,5.6 22.325,5.65 22.546,5.65 23.046,6.15 23.746,6.15 23.846,6.25 U7.7
NetD1_1: D1.1 U3.3 U7.17 | length 2.7
  Top Layer w0.15: v1(26.95,2.53) U7.17
  Top Layer w0.2: D1.1 10.3,2.35 10.45,2.5 10.8,2.5 11.1,2.8 ; v1@11.15,3.05 v1(11.1,3.05) 11.157,2.993 11.157,2.883 11.451,2.59 11.775,2.59 U3.3
NetD1_2: D1.2 R6.2 | length 0.9
  Top Layer w0.2: D1.2 9.436,2.336 9.436,3.114 R6.2
NetD2_1: D2.1 U3.4 U7.18 | length 2.6
  Top Layer w0.15: U7.18@27.445,3.12 U7.18 v1(27.45,2.04)
  Top Layer w0.2: D2.1 10.75,1.44 11.053,1.743 11.053,1.983 v1(11.11,2.04) U3.4
NetD2_2: D2.2 R5.2 | length 4.7
  Top Layer w0.2: D2.2 9.01,1.39 8.7,1.7 8.7,3.823 8.817,3.94 R5.2
NetD3_2: D3.2 R14.2 | length 0.9
  Top Layer w0.15: R14.2 33.97,4.829 D3.2
NetD4_1: D4.1 J2.5 | length 0.7
  Top Layer w0.2: v1(19.9,5.6) D4.1
NetD5_2: D5.2 Q1.3 V.1
NetD44_1: D44.1 U7.37 | length 1.2
  Top Layer w0.15: U7.37 v1(30.45,11.04)
NetD44_3: D44.3 U7.38 | length 0.7
  Top Layer w0.15: U7.38 v1(29.95,10.535)
NetD44_4: D44.4 USB.A6 | length 2.5
  Top Layer w0.2: USB.A6 7.298,6.772 7.92,6.772 8.248,7.099 8.248,7.122 8.576,7.45 8.65,7.45 9,7.8 D44.4
NetD44_6: D44.6 USB.A7 | length 2.2
  Top Layer w0.2: USB.A7 8.077,6.223 8.4,5.9 D44.6
NetIC22_C3: IC22.C3 U7.28 | length 1.6
  Top Layer w0.15: U7.28 31.095,5.23 31.64,5.23 31.79,5.08 31.79,4.24 v1(31.8,4.23)
NetIC22_C4: IC22.C4 U7.44 | length 0.7
  Top Layer w0.15: U7.44 v1(26.95,10.55)
NetIC22_C6: IC22.C6 U7.5 | length 2.5
  Top Layer w0.2: v1(22.05,6.7) 22.107,6.757 22.523,6.757 22.715,6.95 23.415,6.95 23.565,7.1 23.665,7.1 23.815,7.25 U7.5
NetIC22_C7: IC22.C7 U7.45 | length 1.1
  Top Layer w0.15: U7.45 26.45,11.004 v1(26.457,11.012)
NetIC22_C8: IC22.C8 U7.19 | length 0.7
  Top Layer w0.15: v1(27.95,2.52) U7.19
  Top Layer w0.2: U7.19@27.9,3.075 U7.19
NetIC22_D4: IC22.D4 U7.43 | length 1.1
  Top Layer w0.15: U7.43 v1(27.45,11.004)
  other v1: 12.8,9.6
NetIC22_D5: IC22.D5 U7.29 | length 1.8
  Top Layer w0.15: U7.29 31.58,5.75 32.31,5.02 v1(32.31,4.72)
  other v1: 12.8,8.8
NetIC22_H4: IC22.H4 U7.9 | length 0.7
  Top Layer w0.2: v1(23.606,5.238) 23.612,5.244 24.319,5.244 U7.9
  other v1: 16,9.6
NetIC22_J4: IC22.J4 U7.10 | length 1.1
  Top Layer w0.2: v1(23.3,4.636) 23.357,4.693 23.84,4.693 23.847,4.7 24.275,4.7 U7.10
  other v1: 16.8,9.6
NetIC22_J7: IC22.J7 U7.14 | length 1.1
  Top Layer w0.15: U7.14@25.425,3.1 U7.14 v1(25.45,2.05)
  other v1: 16.8,7.2
NetIC22_J8: IC22.J8 U7.16 | length 1.1
  Top Layer w0.15: U7.16@26.435,3.11 U7.16 v1(26.45,2.05)
NetIC22_K4: IC22.K4 U7.11 | length 0.8
  Top Layer w0.2: v1(23.623,4.043) 23.705,4.043 23.861,4.2 24.275,4.2 U7.11
NetIC22_K5: IC22.K5 U7.12 | length 0.8
  Top Layer w0.2: v1(23.654,3.36) 23.711,3.417 23.867,3.417 24.15,3.7 24.275,3.7 U7.12
NetIC22_K6: IC22.K6 U7.13 | length 0.6
  Top Layer w0.15: U7.13@24.935,3.11 U7.13 v1(24.95,2.51)
NetIC22_K7: IC22.K7 U7.15 | length 0.6
  Top Layer w0.15: v1(25.95,2.52) U7.15
NetJ2_2: J2.2 R10.2 U7.39 | length 2.1
  Top Layer w0.15: U7.39 29.45,10.92 29.89,11.36 29.89,11.611 R10.2
NetJ2_3: J2.3 R9.2 U7.41 | length 2.2
  Top Layer w0.15: R9.2@27.76,11.739 R9.2 27.753,11.71 27.914,11.549 27.914,11.293 28.45,10.757 U7.41
NetL2_2: L2.2 U7.33 | length 2.1
  Top Layer w0.15: U7.33 32.022,7.75 32.192,7.92 L2.2
NetL3_2: L3.2 U7.8 | length 2.6
  Top Layer w0.2: L3.2 22.6,5.138 23.225,5.763 23.824,5.763 23.836,5.75 U7.8
NetMD1_A3: MD1.A3 U7.21 | length 1.6
  Top Layer w0.2: MD1.A3 29,1.587 29,3.075 U7.21
NetO1_1: O1.1 U7.25 | length 2.6
  Top Layer w0.15: U7.25 31.58,3.75 32.585,2.745 O1.1
  Top Layer w0.2: U7.25 U7.25@31.125,3.8
NetO1_3: O1.3 U7.24 | length 6
  Top Layer w0.15: U7.24 30.465,3.14 31.229,3.14 31.714,2.654 31.714,2.156 32.2,1.67 32.2,1.171 32.676,0.695 34.035,0.695 34.173,0.833 34.173,1.353 O1.3
NetQ1_1: Q1.1 R11.1 R12.1
NetR1_1: R1.1 U3.15 | length 0.9
  Top Layer w0.2: U3.15 12.95,4.165 12.95,4.49 13.1,4.64 R1.1
NetR2_1: R2.1 U3.13 U7.42 | length 2.3
  Top Layer w0.15: U7.42 v1(27.95,10.55)
  Top Layer w0.2: U3.13 R2.1@13.9,4.911 ; R2.1 v1(14.711,4.961)
NetR3_2: R3.2 R4.1 U3.8 | length 2
  Top Layer w0.2: R4.1@12.979,0.369 13,0.369 13.136,0.505 13.191,0.45 R3.2 13.861,0.489 13.861,1.426 U3.8 ; R4.1@13.036,0.505 R4.1@13.036,0.552
NetR8_1: R8.1 USB.A5 | length 2.2
  Top Layer w0.2: USB.A5 7.3,7.775 7.92,7.775 8.342,8.197 8.342,8.342 8.9,8.9 R8.1
NetR12_2: R12.2 U7.36 | length 1
  Top Layer w0.15: U7.36 31.075,9.735 31.45,10.11 v1(31.45,10.12)
NetR14_1: R14.1 U7.30 | length 2.6
  Top Layer w0.15: U7.30 31.77,6.25 33.12,4.9 R14.1
NetR15_1: R15.1 U2.6 U4.2 U5.13 U7.46 | length 3
  Top Layer w0.15: U7.46 25.95,12.171 R15.1
  Top Layer w0.2: R15.1 v1(26.6,12.2)
NetR16_1: R16.1 U2.5 U4.4 U5.14 U7.47 | length 1.6
  Top Layer w0.2: R16.1 v1(25.379,11.514) ; U7.47 25.464,9.889 R16.1@25.464,10.886
NetR17_1: R17.1 SW1.2 U7.4 | length 4.1
  Top Layer w0.2: v1(21.3,6.7) 21.279,6.721 21.279,7.402 21.279,7.426 R17.1 21.407,7.372 21.729,7.372 21.751,7.35 23.249,7.35 23.425,7.526 23.425,7.583 23.542,7.7 24.275,7.7 U7.4
NetU2_7: U2.7 U7.6 | length 4.5
  Top Layer w0.2: v1(20.526,6.713) 20.583,6.656 20.583,6.349 20.832,6.1 22.431,6.1 22.881,6.55 23.581,6.55 23.731,6.7 24.275,6.7 U7.6
NetU3_14: U3.14
VBAT: B.1 C1.2 C4.2 U1.1 U1.3 U3.10 U3.11 | length 17.1
  Top Layer w0.2: U3.10 15.28,2.54 15.5,2.76 C4.2 ; U3.11 15.26,3.04 C4.2@15.4,2.9 ; v1(15.2,3.65) 15.2,3.569 15.4,3.369 C4.2@15.4,2.9 ; B.1 19.05,1.3 19.05,2.35 18.62,2.78 C4.2 ; C4.2@15.4,2.9 15.4,2.88 C4.2
  Bottom Layer w0.2: U1.3@12.35,1.25 12.641,1.25 12.841,1.05 12.841,0.817 12.959,0.7 14.9,0.7 15.2,1 v1@15.2,3.569 ; U1.1@12.35,3.15 13.54,3.15 13.59,3.2 C1.2 13.69,3.1 14.731,3.1 v1@15.2,3.569 ; v1(15.2,3.65) v1@15.2,3.569
VUSB: C6.1 D44.5 R5.1 R6.1 R8.2 U3.1 U3.2 USB.A4-B9 USB.B4-A9 | length 16.3
  Top Layer w0.2: USB.B4-A9 8.124,4.074 8.728,4.678 10.588,4.678 10.679,4.769 10.679,4.678 R5.1 ; USB.A4-B9@7.275,8.85 USB.A4-B9 7.445,9.07 8.07,9.07 8.55,9.55 9.4,9.55 9.521,9.429 9.521,9.036 9.657,8.9 R8.2 9.7,8.9 10.45,8.15 10.45,7.15 10.15,6.85 ; D44.5 10.15,6.85 ; R6.1 10.25,3.15 10.521,3.421 10.521,3.804 10.657,3.94 R5.1 ; C6.1 10.55,4.96 10.55,6.45 10.15,6.85 ; U3.2@11.725,3.04 U3.2 U3.1 11.725,3.54 11.375,3.89 10.729,3.89 R5.1
pads on no net: ANT2.2 IC22.A1 IC22.A2 IC22.A9 IC22.A10 IC22.B1 IC22.B9 IC22.B10 IC22.D3 IC22.D6 IC22.D7 IC22.D8 IC22.E3 IC22.E4 IC22.E5 IC22.E6 IC22.E7 IC22.E8 IC22.F3 IC22.F4 IC22.F5 IC22.F6 IC22.F7 IC22.F8 IC22.G3 IC22.G4 IC22.G5 IC22.G6 IC22.G7 IC22.G8 IC22.H3 IC22.H5 IC22.H6 IC22.H7 IC22.J3 IC22.J5 IC22.L1 IC22.L2 IC22.L9 IC22.L10 IC22.M1 IC22.M2 IC22.M9 IC22.M10 SW1. SW1.1 U3.16 U3.17 U4.7 U5.2 U5.3 U5.4 U5.9 U5.10 U5.11 U7.26 U7.27 USB.A8 USB.B5 USB.B6 USB.B7 USB.B8

## Polygon pours and split planes (outlines as drawn)
GND on Sub Top Layer "GND_L02_P000" (solid, pour order 0): 0,0 0,13 35.2,13 35.2,0
+3.3 on Sub Bottom Layer "+3.3_L03_P002" (solid, pour order 2): 0,12.95 0,0 35.2,0 35.2,13

## Silkscreen, mask and mechanical layers (free items; w line width, h text height)
Top Overlay:
  the board outline again, w0.254

## Text inside footprints (layer, text, board x,y; h text height)
D5: Top 3D Body "*" at 13.46,52.391 h1.27 r90; Top Overlay "*" at 13.46,50.9 h1.27 r90
USB: Top 3D Body "*" at 6.615,12.532 h1.27 r270; Top Overlay "*" at 6.615,12.532 h1.27 r270